# Altium PCB Quad FC V10.2.PcbDoc
Units mil, origin at the board's own origin, x right, y up, seen from the top; angles counter-clockwise.
Board outline 1968.5 x 1968.5 mil, 2 copper layers (Top Layer, Bottom Layer); 71 components, 48 nets, 303 pads, 19 vias.
Unrouted connection lines stored in the file: 22.
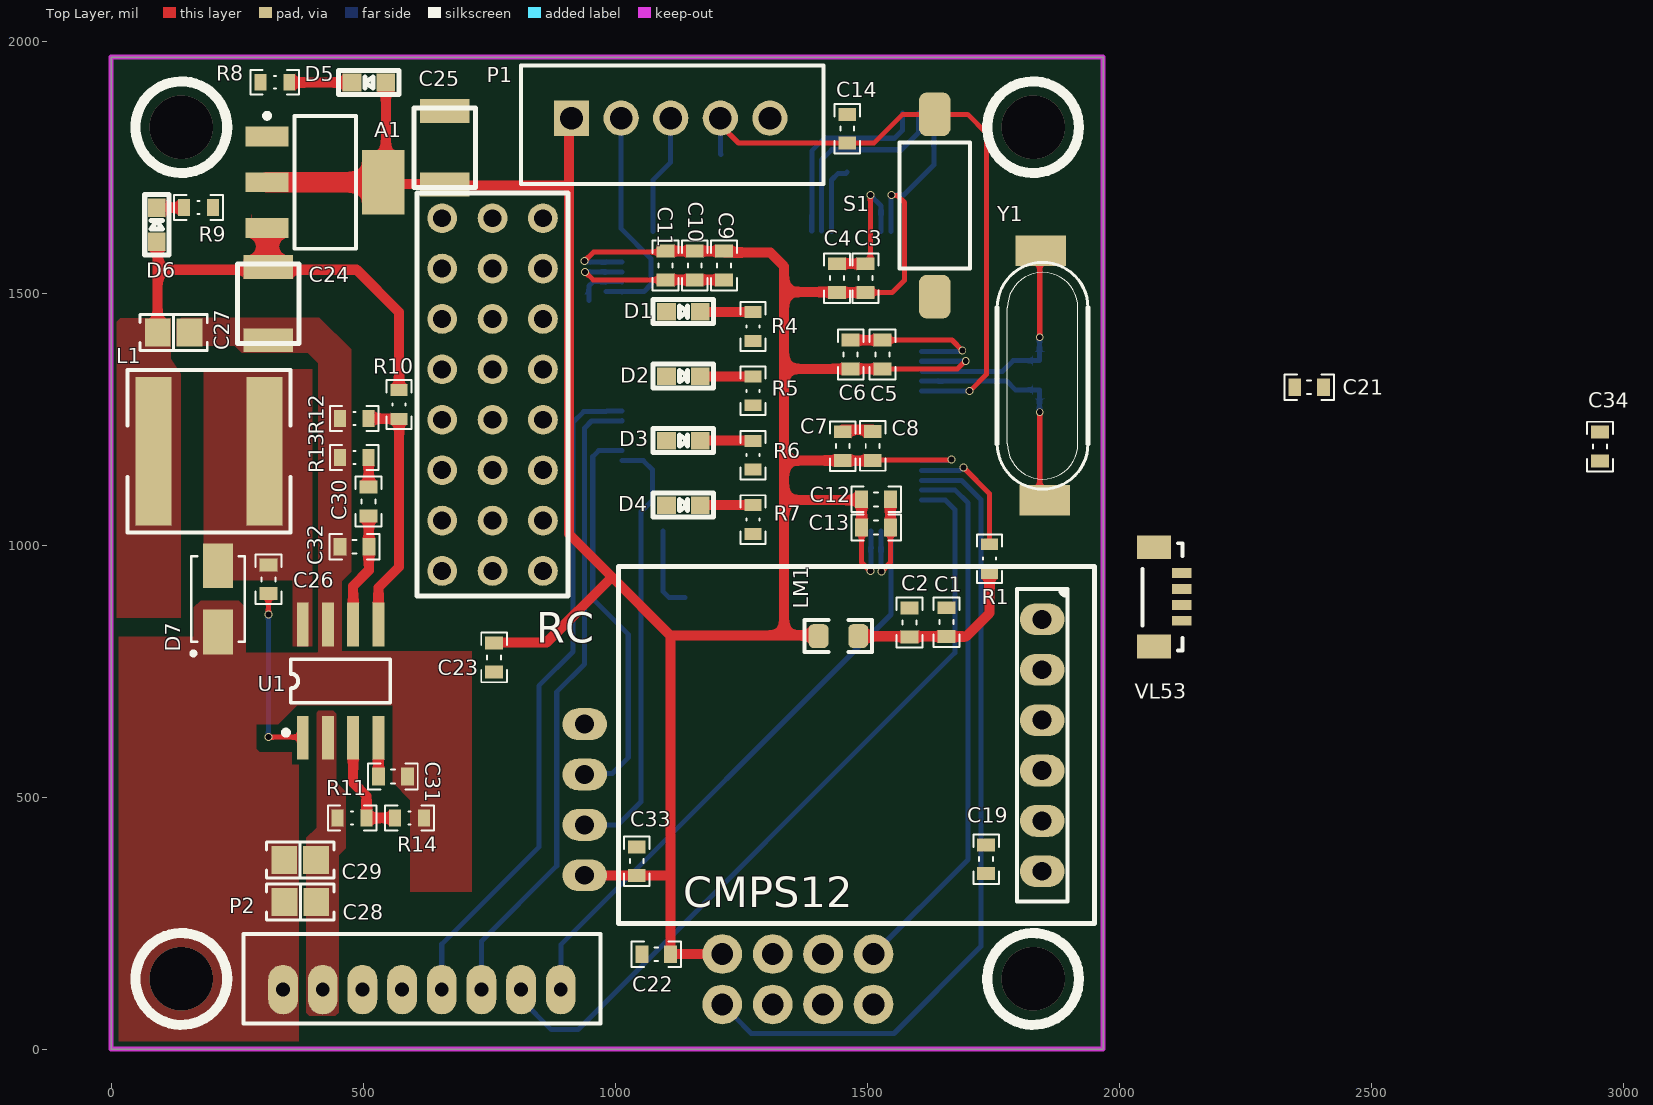
[diagram p0: Top Layer view]
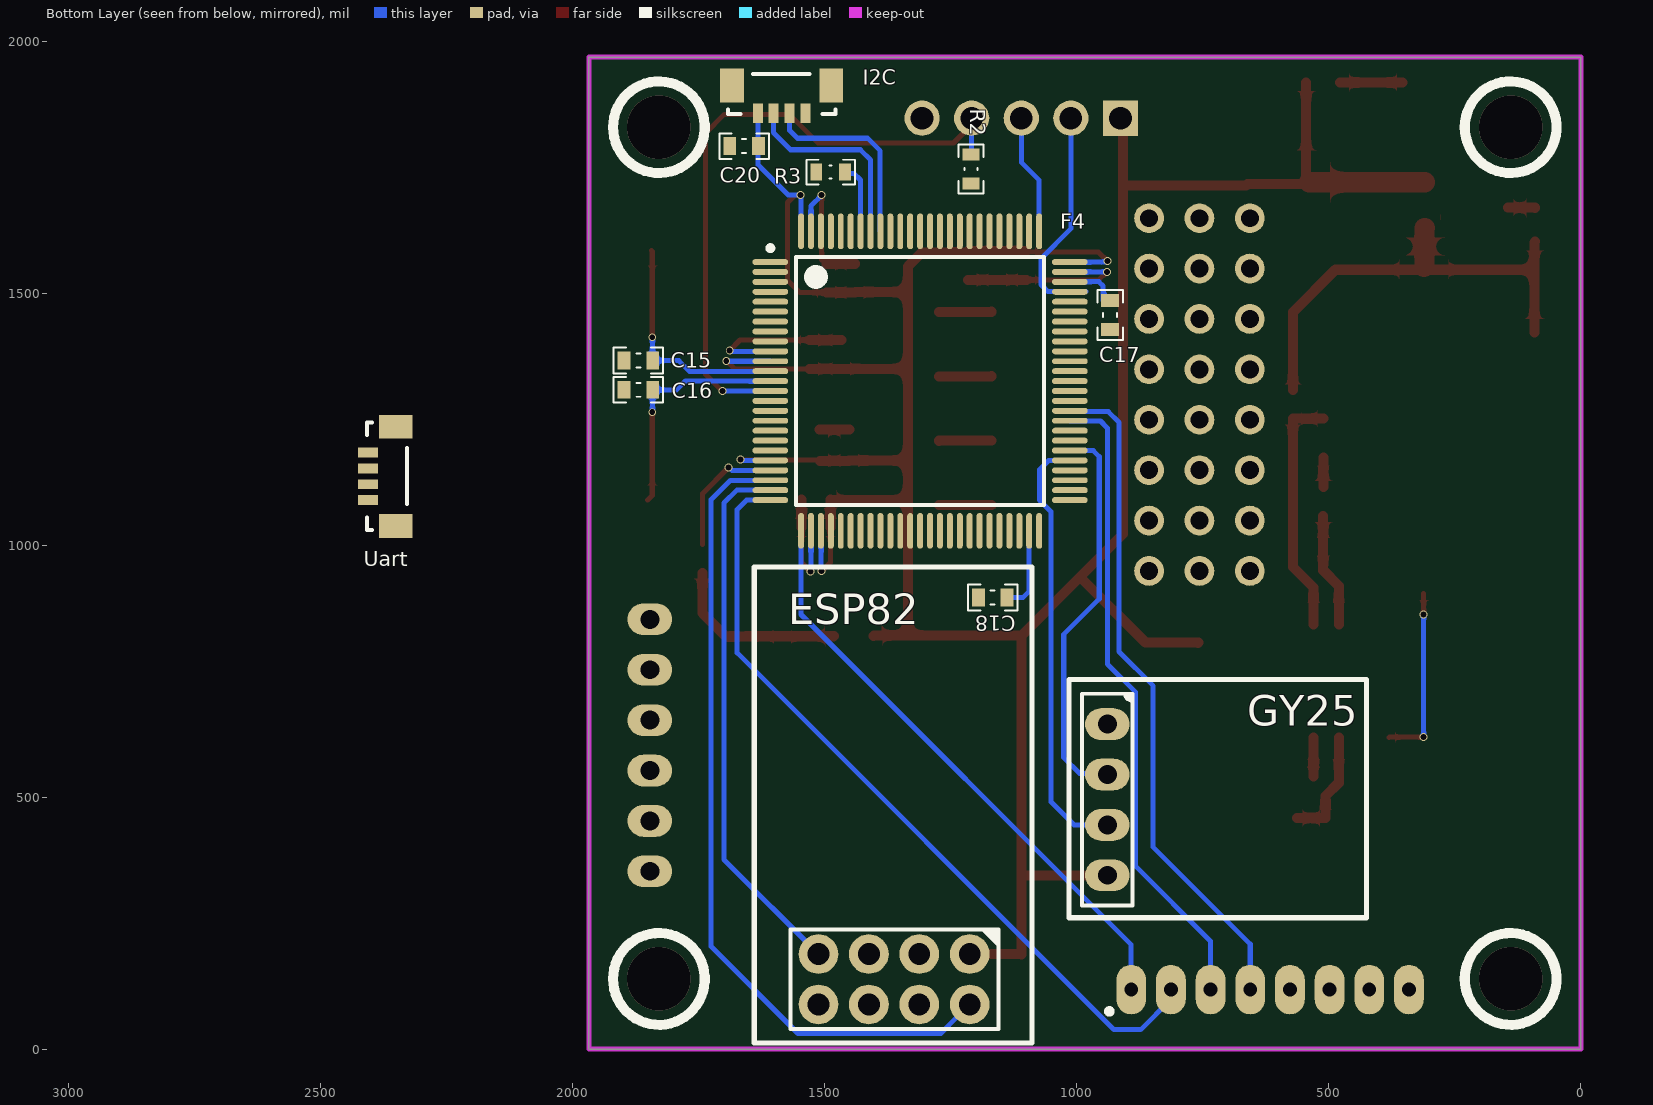
[diagram p1: Bottom Layer view, seen from below]

## Layer stack, top to bottom
Top Solder: solder mask 0.4, Solder Resist, Dk 3.5
Top Layer: signal copper 1.4
Dielectric 1: dielectric 12.6, FR-4, Dk 4.8
Bottom Layer: signal copper 1.4
Bottom Solder: solder mask 0.4, Solder Resist, Dk 3.5

## Board outline
0,0 1968.5,0 1968.5,1968.5 0,1968.5

## Design rules (kind name [scope] priority, off if disabled: settings)
Clearance Clearance_1 [InNamedPolygon('GND_L01_P011')] p1: gap=10 ignorepadtopadclearanceinfootprint=FALSE except(0: Arc-Hole Track-Hole SMDPad-Hole THPad-Hole Via-Hole Fill-Hole Poly-Hole Region-Hole Text-Hole)
Clearance [All] p2: gap=6 ignorepadtopadclearanceinfootprint=FALSE except(0: Arc-Hole Track-Hole SMDPad-Hole THPad-Hole Via-Hole Fill-Hole Poly-Hole Region-Hole Text-Hole)
HoleSize [All] p1: absolutevalues=TRUE maxlimit=393.7 minlimit=1 maxpercent=80.000 minpercent=20.000
PlaneConnect PlaneConnect_2 [All] p1: planeconnectstyle=Direct reliefexpansion=20 reliefentries=4 reliefconductorwidth=10 reliefairgap=10
PlaneConnect PlaneConnect_1 [All] p2: planeconnectstyle=Relief reliefexpansion=20 reliefentries=4 reliefconductorwidth=10 reliefairgap=10
PlaneConnect [All] p3: planeconnectstyle=Relief reliefexpansion=20 reliefentries=4 reliefconductorwidth=10 reliefairgap=10
PolygonConnect PolygonConnect_27 [All vs IsNamedPolygon('GND_L01_P011')] p1: connectstyle=Direct reliefconductorwidth=10 reliefentries=4 polygonreliefangle="90 Angle" airgapwidth=10
PolygonConnect PolygonConnect_26 [All vs IsNamedPolygon('NETC26_1_L01_P009')] p2: connectstyle=Direct reliefconductorwidth=10 reliefentries=4 polygonreliefangle="90 Angle" airgapwidth=10
PolygonConnect PolygonConnect_25 [All vs IsNamedPolygon('12V_L01_P010')] p3: connectstyle=Direct reliefconductorwidth=10 reliefentries=4 polygonreliefangle="90 Angle" airgapwidth=10
PolygonConnect PolygonConnect_24 [All vs IsNamedPolygon('VBAT+_L01_P008')] p4: connectstyle=Direct reliefconductorwidth=10 reliefentries=4 polygonreliefangle="90 Angle" airgapwidth=10
PolygonConnect PolygonConnect_23 [All vs IsNamedPolygon('NETC17_1_L01_P008')] p5: connectstyle=Direct reliefconductorwidth=10 reliefentries=4 polygonreliefangle="90 Angle" airgapwidth=10
PolygonConnect PolygonConnect_22 [All vs IsNamedPolygon('VBAT+_L01_P007')] p6: connectstyle=Direct reliefconductorwidth=10 reliefentries=4 polygonreliefangle="90 Angle" airgapwidth=10
PolygonConnect PolygonConnect_21 [All vs IsNamedPolygon('VBAT+_L01_P007')] p7: connectstyle=Direct reliefconductorwidth=10 reliefentries=4 polygonreliefangle="90 Angle" airgapwidth=10
PolygonConnect PolygonConnect_20 [All vs IsNamedPolygon('NONET_L01_P003')] p8: connectstyle=Direct reliefconductorwidth=10 reliefentries=4 polygonreliefangle="90 Angle" airgapwidth=10
PolygonConnect PolygonConnect_19 [All vs IsNamedPolygon('NONET_L01_P003')] p9: connectstyle=Direct reliefconductorwidth=10 reliefentries=4 polygonreliefangle="90 Angle" airgapwidth=10
PolygonConnect PolygonConnect_18 [All vs IsNamedPolygon('NONET_L01_P002')] p10: connectstyle=Direct reliefconductorwidth=10 reliefentries=4 polygonreliefangle="90 Angle" airgapwidth=10
PolygonConnect PolygonConnect_17 [All vs IsNamedPolygon('NONET_L01_P001')] p11: connectstyle=Direct reliefconductorwidth=10 reliefentries=4 polygonreliefangle="90 Angle" airgapwidth=10
PolygonConnect PolygonConnect_16 [All vs IsNamedPolygon('NETC37_1_L01_P000')] p12: connectstyle=Direct reliefconductorwidth=10 reliefentries=4 polygonreliefangle="90 Angle" airgapwidth=10
PolygonConnect PolygonConnect_15 [All vs IsNamedPolygon('GND_L02_P008')] p13: connectstyle=Direct reliefconductorwidth=10 reliefentries=4 polygonreliefangle="90 Angle" airgapwidth=10
PolygonConnect PolygonConnect_14 [All vs IsNamedPolygon('GND_L01_P007')] p14: connectstyle=Direct reliefconductorwidth=10 reliefentries=4 polygonreliefangle="90 Angle" airgapwidth=10
PolygonConnect PolygonConnect_13 [All vs IsNamedPolygon('GND_L02_P001') Or IsNamedPolygon('NONET_L02_P004')] p15: connectstyle=Direct reliefconductorwidth=10 reliefentries=4 polygonreliefangle="90 Angle" airgapwidth=10
PolygonConnect PolygonConnect_12 [All vs IsNamedPolygon('GND_L01_P006')] p16: connectstyle=Direct reliefconductorwidth=10 reliefentries=4 polygonreliefangle="90 Angle" airgapwidth=10
PolygonConnect PolygonConnect_11 [All vs IsNamedPolygon('GND_L01_P005')] p17: connectstyle=Direct reliefconductorwidth=10 reliefentries=4 polygonreliefangle="90 Angle" airgapwidth=10
PolygonConnect PolygonConnect_10 [All vs IsNamedPolygon('NETC37_1_L01_P002')] p18: connectstyle=Direct reliefconductorwidth=10 reliefentries=4 polygonreliefangle="90 Angle" airgapwidth=10
PolygonConnect PolygonConnect_9 [All vs IsNamedPolygon('MP1584-FB_L01_P005')] p19: connectstyle=Direct reliefconductorwidth=10 reliefentries=4 polygonreliefangle="90 Angle" airgapwidth=10
PolygonConnect PolygonConnect_8 [All vs IsNamedPolygon('GND_L02_P001')] p20: connectstyle=Direct reliefconductorwidth=10 reliefentries=4 polygonreliefangle="90 Angle" airgapwidth=10
PolygonConnect PolygonConnect_7 [All vs IsNamedPolygon('MP1584-FB_L01_P005')] p21: connectstyle=Direct reliefconductorwidth=10 reliefentries=4 polygonreliefangle="90 Angle" airgapwidth=10
PolygonConnect PolygonConnect_6 [All vs IsNamedPolygon('MP1584-FB_L01_P005')] p22: connectstyle=Direct reliefconductorwidth=10 reliefentries=4 polygonreliefangle="90 Angle" airgapwidth=10
PolygonConnect PolygonConnect_5 [All vs IsNamedPolygon('NONET_L02_P004')] p23: connectstyle=Direct reliefconductorwidth=10 reliefentries=4 polygonreliefangle="90 Angle" airgapwidth=10
PolygonConnect PolygonConnect_4 [All vs IsNamedPolygon('NETC34_1_L01_P003')] p24: connectstyle=Direct reliefconductorwidth=10 reliefentries=4 polygonreliefangle="90 Angle" airgapwidth=10
PolygonConnect PolygonConnect_3 [All vs IsNamedPolygon('NETC34_2_L01_P002')] p25: connectstyle=Direct reliefconductorwidth=10 reliefentries=4 polygonreliefangle="90 Angle" airgapwidth=10
PolygonConnect PolygonConnect_2 [All vs IsNamedPolygon('GND_L02_P001')] p26: connectstyle=Direct reliefconductorwidth=10 reliefentries=4 polygonreliefangle="90 Angle" airgapwidth=10
PolygonConnect PolygonConnect_1 [All vs IsNamedPolygon('VBAT+_L01_P000')] p27: connectstyle=Direct reliefconductorwidth=10 reliefentries=4 polygonreliefangle="90 Angle" airgapwidth=10
PolygonConnect [All] p28: connectstyle=Relief reliefconductorwidth=10 reliefentries=4 polygonreliefangle="90 Angle" airgapwidth=10
RoutingVias [All] p1: holewidth=11.81 width=15.75 viastyle="Through Hole" minholewidth=10 minwidth=10 maxholewidth=196.85 maxwidth=196.85
SilkToSilkClearance [All] p1: silktosilkclearance=6
SolderMaskExpansion [All] p1: expansion=2 istentingtop=FALSE soldermaskfromhole=TRUE
Width [All] p1: maxlimit=60 minlimit=6 preferedwidth=20
27 further rules are at their usual default settings.

## Classes and differential pairs
component class "Quad FC power V10.2": A1 C24 C25 C26 C27 C28 C29 C30 C31 C32 D5 D6 D7 L1 P2 R8 R9 R10 R11 R12 R13 R14 U1
component class "Quad FC V10.2": -- C1 C2 C3 C4 C5 C6 C7 C8 C9 C10 C11 C12 C13 C14 C15 C16 C17 C18 C19 C20 C21 C22 C23 C33 C34 CMPS12 D1 D2 D3 D4 ESP82 F4 GY25 I2C LM1 P1 R1 R2 R3 R4 R5 R6 R7 RC S1 Uart VL53 Y1

## Components (designator, comment, footprint, x,y, rotation, side; value= is the part's Value field where it differs from the comment)
A1 "3.3V linear regulator" SOT230P700X180-4N 424.41,1720.08 r0 top
C1 "100nF" CAP0603 1657.43,847.17 r270 top
C2 "1uF" CAP0603 1583.86,846.46 r270 top
C3 "100nF" CAP0603 1496.85,1529.92 r270 top
C4 "100nF" CAP0603 1440.16,1529.92 r270 top
C5 "100nF" CAP0603 1530.32,1378.35 r270 top
C6 "100nF" CAP0603 1467.32,1378.35 r270 top
C7 "100nF" CAP0603 1451.58,1196.46 r90 top
C8 "1uF" CAP0603 1511.02,1196.85 r90 top
C9 "100nF" CAP0603 1215.75,1554.92 r90 top
C10 "4.7uF" CAP0603 1157.87,1554.92 r90 top
C11 "100nF" CAP0603 1100,1554.92 r90 top
C12 "100nF" CAP0603 1517.72,1090.95 r180 top
C13 "100nF" CAP0603 1517.72,1035.04 r180 top
C14 "100nF" CAP0603 1460.63,1826.38 r90 top
C15 "10pF" CAP0603 1870.08,1366.14 r180 bottom
C16 "10pF" CAP0603 1870.08,1308.27 r0 bottom
C17 "2.2uF" CAP0603 933.86,1456.69 r270 bottom
C18 "2.2uF" CAP0603 1166.93,896.06 r0 bottom
C19 "100nF" CAP0603 1736.22,376.77 r90 top
C20 "100nF" CAP0603 1660.24,1791.73 r0 bottom
C21 "100nF" CAP0603 2377.17,1313.39 r180 top
C22 "100nF" CAP0603 1081.5,188.19 r180 top
C23 "100nF" CAP0603 759.84,777.17 r270 top
C24 "10uF" MY_CAP_SMD-B 311.42,1479.13 r270 top value=3300u
C25 "100uF" MY_CAP_SMD-B 661.81,1788.58 r90 top value=3300u
C26 "100nF" CAP0603 312.2,932.28 r270 top
C27 "10 µF" "CAP 0805_2012" 123.62,1422.05 r180 top
C28 "10 µF" "CAP 0805_2012" 375.2,291.73 r0 top
C29 "10 µF" "CAP 0805_2012" 374.8,375.2 r0 top
C30 "1nF" CAP0603 510.63,1086.61 r90 top
C31 "8.2nF" CAP0603 559.06,540.95 r0 top
C32 "10pF" CAP0603 482.68,996.85 r180 top
C33 "100nF" CAP0603 1042.91,372.83 r90 top
C34 "100nF" CAP0603 2954.32,1195.67 r90 top
CMPS12 "CMPS12" "SAMTEC SSW-106-03-T-S" 1847.25,602.76 r270 top
D1 "LED" "0603 - LED" 1135.43,1463.39 r0 top
D2 "LED" "0603 - LED" 1135.43,1335.43 r0 top
D3 "LED" "0603 - LED" 1135.43,1207.48 r0 top
D4 "LED" "0603 - LED" 1135.43,1079.53 r0 top
D5 "LED" "0603 - LED" 511.42,1918.11 r180 top
D6 "LED" "0603 - LED" 90.55,1635.83 r90 top
D7 "1n5822" DIOM4226X244N 212.2,893.31 r90 top
ESP82 "ESP82" "HARWIN M20-7830445" 1362.6,138.58 r270 bottom
F4 "STM32F407VGT6" STM-LQFP100_N 1311.02,1325.59 r180 bottom
GY25 "GY25" "SAMTEC SSW-104-03-T-S" 939.37,494.88 r270 bottom
I2C "I2C" "JST BM04B-SURS-TF" 1585.83,1884.65 r180 bottom
L1 "10 µH" "TAIYO YUDEN NRS8030" 194.09,1186.22 r180 top
LM1 "10uH" 0805L 1442.91,819.69 r180 top value=FB805
P1 "Programming connector" Connector1X5 913.39,1847.25 r0 top
P2 "Connector 8" "JST B8B-PH-K" 616.54,118.11 r180 top
R1 "0" RES0603 1742.91,973.23 r90 top
R2 "1K" RES0603 1209.84,1746.46 r90 bottom
R3 "1K" RES0603 1488.58,1740.16 r0 bottom
R4 "1K" RES0603 1273.62,1433.86 r270 top
R5 "1K" RES0603 1273.62,1306.17 r270 top
R6 "1K" RES0603 1273.62,1178.48 r270 top
R7 "1K" RES0603 1273.62,1050.79 r270 top
R8 "1K" RES0603 324.8,1918.51 r180 top
R9 "1K" RES0603 173.23,1670.08 r0 top
R10 "10.2k" RES0603 571.26,1279.13 r90 top
R11 "0.732k" RES0603 477.95,458.66 r180 top
R12 "0.732k" RES0603 482.28,1251.58 r0 top
R13 "36.5K" RES0603 482.28,1174.02 r0 top value=36.5k
R14 "0.732k" RES0603 591.93,458.66 r180 top
RC "Radio Control" HEADER8X3 856.69,948.82 r90 top
S1 "FSMSMTR" "TE FSMSMTR" 1634.25,1674.02 r0 top
U1 "TPS54331" SO8 455.12,730.32 r0 top
Uart "Uart" "JST BM04B-SURS-TF" 2379.13,1136.62 r270 bottom
VL53 "VL53" "JST BM04B-SURS-TF" 2096.85,897.24 r90 top
Y1 "CRYSTAL_SMD" "My_Crystal - SMD" 1848.16,1336.22 r90 top

## Footprints (in the part's own frame and the unit in brackets; to place one, negate y for a bottom-side part, rotate by r counter-clockwise, add the part's x,y. Pads: shape width x height; smd on the part's side, far side on the other; paste and mask are expansions set on the pad)
"0603 - LED" [mil]
  rect 37x35 smd: 1(-33.5,0) 2(33.5,0)
  silkscreen extent -60,-24 60,24, body extent -32,-16 32,16, height 43
0805L [mm] ",0805, 2012, 200X130"
  rrect50% 1x1.2 smd mask+0.075: 1(-1,0) 2(1,0)
  Top Layer pour cut-out: -0.5,0.8 0.5,0.8 0.5,-0.8 -0.5,-0.8
  silkscreen extent -1.7,-0.8 1.7,0.8, body extent -1,-0.6 1,0.6, height 0.95
CAP0603 [mm] "Chip Capacitor, 2-Leads, Body 1/60x0/80mm, IPC Medium Density DESIGNER:ABBAS BASEREH"
  rect 0.65x0.9 smd: 1(-0.725,0) 2(0.725,0)
  silkscreen extent -1.25,-0.65 1.25,0.65, body extent -0.82,-0.43 0.82,0.43, height 0.4
"CAP 0805_2012" [mm] "Chip Capacitor, 2-Leads, Body 2.00x1.20mm, IPC Medium Density"
  rect 1.3x1.4 smd: 1(-0.8,0) 2(0.8,0)
  silkscreen extent -1.7,-0.9 1.7,0.9, body extent -1,-0.64 1,0.64, height 1.26
Connector1X5 [mil] "Connector; Header; 5 Position"
  rect 70x70 hole 45: 1(0,0)
  round 70 hole 45: 2(98.43,0) 3(196.85,0) 4(295.28,0) 5(393.7,0)
  silkscreen extent -100,-130 500,104, body extent -93,-133 493,93, height 276
DIOM4226X244N [mm]
  rect 2.26x1.51 smd: 1(-1.67,0) 2(1.67,0)
  silkscreen extent -2.85,-1.35 2.15,1.35, body extent -2.6,-1.36 2.6,1.36, height 1.19
"HARWIN M20-7830445" [mm] "2.54mm DIL PC TAIL PIN HEADER ASSEMBLY"
  round 2 hole 1.1: 1(-1.27,3.81) 2(-1.27,1.27) 3(-1.27,-1.27) 4(-1.27,-3.81) 5(1.27,-3.81) 6(1.27,-1.27) 7(1.27,1.27) 8(1.27,3.81)
  silkscreen extent -2.5,-5.23 2.5,5.27, body extent -2.52,-5.28 2.52,5.28, height 8.5
HEADER8X3 [mm]
  round 1.5 hole 0.9: 1(0,0) 2(2.54,0) 3(5.08,0) 4(7.62,0) 5(10.16,0) 6(12.7,0) 7(15.24,0) 8(17.78,0) 9(0,2.54) 10(2.54,2.54) 11(5.08,2.54) 12(7.62,2.54) 13(10.16,2.54) 14(12.7,2.54) 15(15.24,2.54) 16(17.78,2.54) 17(0,5.08) 18(2.54,5.08) 19(5.08,5.08) 20(7.62,5.08) 21(10.16,5.08) 22(12.7,5.08) 23(15.24,5.08) 24(17.78,5.08)
  silkscreen extent -1.27,-1.27 19.05,6.35
"JST B8B-PH-K" [mm]
  oval 1.5x2.5 hole 0.7: 1(-7,0) 2(-5,0) 3(-3,0) 4(-1,0) 5(1,0) 6(3,0) 7(5,0) 8(7,0)
  silkscreen extent -9,-2.8 9,1.7, body extent -8.95,-2.8 8.95,1.7, height 6
"JST BM04B-SURS-TF" [mm] "1.0mm pitch/Disconnectable Crimp style connector"
  rect 0.5x1 smd: 1(-1.2,-0.7) 2(-0.4,-0.7) 3(0.4,-0.7) 4(1.2,-0.7)
  rect 1.2x1.7 smd: M(-2.5,0.7) M(2.5,0.7)
  silkscreen extent -2.7,-0.74 2.71,1.27, body extent -2.7,-1.02 2.7,1.23, height 2.75
MY_CAP_SMD-B [mm] "3.1X4"
  rect 1.2x2.5 smd: +(-1.845,0) -(1.845,0)
  silkscreen extent -2,-1.55 2,1.55, body extent -1.85,-1.41 1.85,1.41, height 2.14
"My_Crystal - SMD" [mil]
  rect 60x100 smd: 1(-247.06,-3.93) 2(248.03,3.94)
  silkscreen extent -225,-90 225,90, body extent -247,-98 245,91, height 154
RES0603 [mm] "Chip Resistor, 2-Leads, Body 1/60x0/80mm, IPC Medium Density DESIGNER:ABBAS BASEREH"
  rect 0.6x0.85 smd: 1(-0.725,0) 2(0.725,0)
  silkscreen extent -1.23,-0.63 1.23,0.62, body extent -0.82,-0.43 0.82,0.43, height 0.4
"SAMTEC SSW-104-03-T-S" [mm]
  oval 1.6x2.25 hole 0.95: 1(-3.81,0) 2(-1.27,0) 3(1.27,0) 4(3.81,0)
  silkscreen extent -5.34,-1.27 5.34,1.27, body extent -5.33,-1.21 5.33,1.21, height 8.51
"SAMTEC SSW-106-03-T-S" [mm]
  oval 1.6x2.25 hole 0.95: 1(-6.35,0) 2(-3.81,0) 3(-1.27,0) 4(1.27,0) 5(3.81,0) 6(6.35,0)
  silkscreen extent -7.88,-1.27 7.88,1.27, body extent -7.87,-1.21 7.87,1.21, height 8.51
SO8 [mm]
  rect 0.6x2.2 smd: 1(-1.905,-2.854) 2(-0.635,-2.854) 3(0.635,-2.854) 4(1.905,-2.854) 5(1.905,2.854) 6(0.635,2.854) 7(-0.635,2.854) 8(-1.905,2.854)
  silkscreen extent -2.88,-2.72 2.5,1.1, body extent -2.46,-2.79 2.44,2.98, height 1.45
SOT230P700X180-4N [mm] "SOT223, 4-Leads, Body 6.50x7.00mm (avg), Pitch 2.30mm, IPC Medium Density"
  rect 2.15x1 smd: 1(-2.925,2.3) 2(-2.925,0) 3(-2.925,-2.3)
  rect 2.15x3.25 smd: 4(2.925,0)
  silkscreen extent -3.05,-3.35 1.55,3.47, body extent -1.85,-3.35 1.85,3.35, height 1.8
STM-LQFP100_N [mm] "Thin QFP, 100-Leads, Body 14x14mm, Pitch 0.5mm, IPC Medium Density"
  oval 1.8x0.3 smd: 1(-7.55,6) 2(-7.55,5.5) 3(-7.55,5) 4(-7.55,4.5) 5(-7.55,4) 6(-7.55,3.5) 7(-7.55,3) 8(-7.55,2.5) 9(-7.55,2) 10(-7.55,1.5) 11(-7.55,1) 12(-7.55,0.5) 13(-7.55,0) 14(-7.55,-0.5) 15(-7.55,-1) 16(-7.55,-1.5) 17(-7.55,-2) 18(-7.55,-2.5) 19(-7.55,-3) 20(-7.55,-3.5) 21(-7.55,-4) 22(-7.55,-4.5) 23(-7.55,-5) 24(-7.55,-5.5) 25(-7.55,-6) 51(7.55,-6) 52(7.55,-5.5) 53(7.55,-5) 54(7.55,-4.5) 55(7.55,-4) 56(7.55,-3.5) 57(7.55,-3) 58(7.55,-2.5) 59(7.55,-2) 60(7.55,-1.5) 61(7.55,-1) 62(7.55,-0.5) 63(7.55,0) 64(7.55,0.5) 65(7.55,1) 66(7.55,1.5) 67(7.55,2) 68(7.55,2.5) 69(7.55,3) 70(7.55,3.5) 71(7.55,4) 72(7.55,4.5) 73(7.55,5) 74(7.55,5.5) 75(7.55,6)
  oval 0.3x1.8 smd: 26(-6,-7.55) 27(-5.5,-7.55) 28(-5,-7.55) 29(-4.5,-7.55) 30(-4,-7.55) 31(-3.5,-7.55) 32(-3,-7.55) 33(-2.5,-7.55) 34(-2,-7.55) 35(-1.5,-7.55) 36(-1,-7.55) 37(-0.5,-7.55) 38(0,-7.55) 39(0.5,-7.55) 40(1,-7.55) 41(1.5,-7.55) 42(2,-7.55) 43(2.5,-7.55) 44(3,-7.55) 45(3.5,-7.55) 46(4,-7.55) 47(4.5,-7.55) 48(5,-7.55) 49(5.5,-7.55) 50(6,-7.55) 76(6,7.55) 77(5.5,7.55) 78(5,7.55) 79(4.5,7.55) 80(4,7.55) 81(3.5,7.55) 82(3,7.55) 83(2.5,7.55) 84(2,7.55) 85(1.5,7.55) 86(1,7.55) 87(0.5,7.55) 88(0,7.55) 89(-0.5,7.55) 90(-1,7.55) 91(-1.5,7.55) 92(-2,7.55) 93(-2.5,7.55) 94(-3,7.55) 95(-3.5,7.55) 96(-4,7.55) 97(-4.5,7.55) 98(-5,7.55) 99(-5.5,7.55) 100(-6,7.55)
  silkscreen extent -7.68,-6.25 6.25,6.82, body extent -7,-7 7,7, height 1.6
"TAIYO YUDEN NRS8030" [mm] "Precision Wire Wound Inductor, 2-Leads, Body 8.00x8.00mm, IPC Medium Density"
  rect 1.8x7.5 smd: 1(-2.8,0) 2(2.8,0)
  silkscreen extent -4.1,-4.1 4.1,4.1, body extent -4,-4 4,4, height 3
"TE FSMSMTR" [mm]
  rrect50% 1.6x2.19 smd: 1(0,4.595) 2(0,-4.595)
  silkscreen extent -1.78,-3.17 1.78,3.17, body extent -1.75,-4.98 1.75,4.98, height 4.42

## Part data
A1: library part ams1117
C1 C2 C3 C4 C5 C6 C7 C8 C9 C10 C11 C12 C13 C14 C15 C16 C17 C18 C19 C20 C21 C22 C23 C26 C30 C31 C32 C33 C34: library part "CAP SMD PACKAGE", "F407VET6 Power CAP", Data=2017-3-10, Desc.="CAP SMD TOTAL PACKAGES", Designer="Abbas Basereh"
C24 C25: library part CAP_TANTAL_B, "3.5X2.8MM"
C27 C28 C29: library part GRM21BR61H106KE43K, "CAP CER 10UF 50V X5R 0805", Device Package="0805 (2012 Metric)", Manufacturer="Murata Electronics", Operating Temperature="-55°C ~ 85°C", Supplier Part Number 1=490-GRM21BR61H106KE43KCT-ND, Temperature Coefficient=X5R, Tolerance=±10%, Voltage - Rated=50V, Applications="General Purpose", Capacitance="10 µF", ComponentLink1Description=Datasheet, ComponentLink1URL=https://search.murata.co.jp/Ceramy/image/img/A01X/G101/ENG/GRM21BR61H106KE43-01A.pdf, ComponentLink2Description="DigiKey Link", ComponentLink2URL=https://www.digikey.com/en/products/detail/murata-electronics/GRM21BR61H106KE43K/15191954, LastUpdated="2/9/2024 8:15:01 PM", Lifecycle Status=Active, Minimum Order=1, Mounting Type="Surface Mount, MLCC", Package / Case="0805 (2012 Metric)", Packaging=TapeAndReel, Part Number=GRM21BR61H106KE43K, Part Status=Active, partid=40508, Price=0.05, Series=GRM, Size / Dimension="0.079\" L x 0.049\" W (2.00mm x 1.25mm)", Supplier 1=DigiKey, Thickness (Max)="0.057\" (1.45mm)"
CMPS12: library part SSW-106-03-T-S, "CONN RCPT 6POS 0.1 TIN PCB", Current Rating (Amps)="5.7A per Contact", Insulation Color=Black, Manufacturer="Samtec Inc.", Material Flammability Rating="UL94 V-0", Operating Temperature="-55°C ~ 105°C", Supplier Part Number 1=SAM8865-ND, ComponentLink1Description=Datasheet, ComponentLink1URL=http://suddendocs.samtec.com/prints/ssw-s.pdf, ComponentLink2Description="DigiKey Link", ComponentLink2URL=https://www.digikey.com/en/products/detail/samtec-inc/SSW-106-03-T-S/1790202, Connector Type=Receptacle, Contact Finish - Mating=Tin, Contact Finish - Post=Tin, Contact Length - Post="0.394\" (10.00mm)", Contact Type=Forked, Fastening Type=Push-Pull, Insulation Height="0.335\" (8.51mm)", LastUpdated="6/21/2022 3:09:22 PM", Lifecycle Status=Active, Minimum Order=1, Mounting Type="Through Hole", Number of Positions=6, Number of Positions Loaded=All, Number of Rows=1, Packaging=Bulk, Part Number=SSW-106-03-T-S, Part Status=Active, Pitch - Mating="0.100\" (2.54mm)", Price=0.55, Series=SSW, Style="Board to Board or Cable", Supplier 1=DigiKey, Termination=Solder
D1 D2 D3 D4 D5 D6: "Led", LatestRevisionDate=08-Jul-2005, LatestRevisionNote="Mech Layer 1 removed.", PackageReference=LED-0, Published=8-Jun-2000, Publisher="Altium Limited"
D7: library part "1n5822 SMD", "Schottky Rectifiers", Manufacturer="ON Semiconductor/Fairchild", Data=16-12-2016, Designer="Abbas Basereh", Link=https://www.aliexpress.com/item/Free-shipping-100pcs-1n5822-sma-smd-do-214ac-Schottky-diode-ss34/32337482329.html?spm=2114.01010208.3.1.zLZDsP&ws_ab_test=searchweb0_0,searchweb201602_4_10065_10068_10084_10083_10080_10082_10081_10060_10061_10062_10056_10055_10054_10059_10099_10078_10079_427_10073_10103_10102_10096_10052_10050_10051,searchweb201603_4&btsid=6e50dc92-ac69-45bc-a19e-209af19ce602, Part. No=SS34
ESP82: library part M20-7830442, "CONN RCPT 8POS 0.1 GOLD PCB", Current Rating (Amps)=3A, Insulation Color=Black, Manufacturer="Harwin Inc.", Material Flammability Rating="UL94 V-0", Operating Temperature="-40°C ~ 105°C", Supplier Part Number 1=952-1789-ND, ComponentLink1Description=Datasheet, ComponentLink1URL=https://cdn.harwin.com/pdfs/C001XX_M20_Series_Connectors.pdf, ComponentLink2Description="DigiKey Link", ComponentLink2URL=http://digikey.com/product-detail/en/harwin-inc/M20-7830442/952-1789-ND/3727758, Connector Type=Receptacle, Contact Finish - Mating=Gold, Contact Finish - Post=Tin, Contact Finish Thickness - Mating=Flash, Contact Length - Post="0.118\" (3.00mm)", Contact Type="Female Socket", Fastening Type=Push-Pull, Insulation Height="0.335\" (8.51mm)", LastUpdated="9/21/2022 7:04:26 PM", Lifecycle Status=Active, Mated Stacking Heights="11.04mm, 12.63mm", Minimum Order=1, Mounting Type="Through Hole", Number of Positions=8, Number of Positions Loaded=All, Number of Rows=2, Packaging=Tube, Part Number=M20-7830442, Part Status=Active, Pitch - Mating="0.100\" (2.54mm)", Price=1.36, Row Spacing - Mating="0.100\" (2.54mm)", Series=M20, Style="Board to Board or Cable", Supplier 1=DigiKey, Termination=Solder
F4: "ARM Cortex-M4 32-bit MCU+FPU, 210 DMIPS, 1024 kB Flash, 192 kB Internal RAM, 82 I/Os, 100-pin LQFP, -40 to 85 degC, Tray", I/Os (High Current)=82, Manufacturer=STMicroelectronics, Operating Frequency(F) (Processor speed) (MHz)=168, Supplier Part Number 1=497-11605-ND, Supply Voltage(Vcc) max (V)=3.6, Supply Voltage(Vcc) min (V)=1.8, ComponentLink1Description="Manufacturer URL", ComponentLink1URL=http://www.st.com/web/en/home.html, ComponentLink2Description=Datasheet, ComponentLink2URL=http://www.st.com/st-web-ui/static/active/en/resource/technical/document/datasheet/DM00037051.pdf, ComponentLink3Description="Package Specification", ComponentLink3URL=http://www.st.com/st-web-ui/static/active/en/resource/technical/document/data_brief/DM00071938.pdf, Core="ARM Cortex-M4", D/A Converter=2x12-bit, DatasheetVersion="Rev. 4", FLASH Size (Prog) (kB)=1024, Internal RAM Size (kB)=192, Mounting Technology="Surface Mount", PackageDescription="100-Pin Low Profile Quad Flat Package, 14 x 14 mm Body, 0.5 mm Pitch", PackageReference=LQFP100, PackageVersion="Rev. 1, 06/2013", Packing=Tray, PartNumber=STM32F407VGT6, Supplier 1=Digi-Key, Supplier 2=Farnell, Supplier 3=Newark, Supplier 4=Mouser, Supplier Part Number 2=2064368, Supplier Part Number 3=73T2333, Supplier Part Number 4=511-STM32F407VGT6
GY25: library part SSW-104-03-T-S, "CONN RCPT 4POS 0.1 TIN PCB", Current Rating (Amps)="5.7A per Contact", Insulation Color=Black, Manufacturer="Samtec Inc.", Material Flammability Rating="UL94 V-0", Operating Temperature="-55°C ~ 105°C", Supplier Part Number 1=SSW-104-03-T-S-ND, ComponentLink2Description="DigiKey Link", ComponentLink2URL=http://digikey.com/product-detail/en/samtec-inc/SSW-104-03-T-S/SSW-104-03-T-S-ND/7874034, Connector Type=Receptacle, Contact Finish - Mating=Tin, Contact Finish - Post=Tin, Contact Type=Forked, Fastening Type=Push-Pull, LastUpdated="6/21/2022 3:08:52 PM", Lifecycle Status=Active, Minimum Order=1, Mounting Type="Through Hole", Number of Positions=4, Number of Positions Loaded=All, Number of Rows=1, Packaging=Bulk, Part Number=SSW-104-03-T-S, Part Status=Active, Price=0.83, Series=SSW, Style="Board to Board or Cable", Supplier 1=DigiKey, Termination=Solder
I2C Uart VL53: library part MHDR_1X04, "Male Header 1X04"
L1: library part NRS8030T100MJGJV, "FIXED IND 10UH 3A 42.9 MOHM SMD", Current - Saturation=2.4A, Current Rating (Amps)="3 A", DC Resistance (DCR)="42.9mOhm Max", Device Package=Nonstandard, Frequency - Self Resonant=27MHz, Inductance Frequency - Test="100 kHz", Manufacturer="Taiyo Yuden", Operating Temperature="-40°C ~ 125°C", Ratings=AEC-Q200, Supplier Part Number 1=587-3647-1-ND, Tolerance=±20%, ComponentLink1Description=Datasheet, ComponentLink1URL="https://ds.yuden.co.jp/TYCOMPAS/ut/detail?pn=NRS8030T100MJGJV  &u=M", ComponentLink2Description="DigiKey Link", ComponentLink2URL=https://www.digikey.com/en/products/detail/taiyo-yuden/NRS8030T100MJGJV/4693986, Height - Seated (Max)="0.118\" (3.00mm)", Inductance="10 µH", LastUpdated="2/8/2024 9:55:48 PM", Lifecycle Status=Active, Material - Core=Ferrite, Minimum Order=1, Mounting Type="Surface Mount", Package / Case=Nonstandard, Packaging=TapeAndReel, Part Number=NRS8030T100MJGJV, Part Status=Active, partid=5482, Price=0.23, Series="NR, S Type", Shielding=Shielded, Size / Dimension="0.315\" L x 0.315\" W (8.00mm x 8.00mm)", Supplier 1=DigiKey, Type="Drum Core, Wirewound"
LM1: library part "L SMA 0.25W", "Inductor", Code_IEC=1005, Code_JEITA=0402, LatestRevisionDate=29-May-2009, LatestRevisionNote="IPC-7351 Footprint Added.", PackageDescription="Chip Inductor", PackageReference=0402-A, Published=8-Jun-2000, Publisher="Altium Limited"
P1: library part Connector1x5, "Connector, 5-Pin2.5mm", LatestRevisionDate=17-Jul-2002, LatestRevisionNote="Re-released for DXP Platform.", Publisher="Altium Limited"
P2: library part Connector1x8, "Connector, 8-Pin2.5mm", LatestRevisionDate=17-Jul-2002, LatestRevisionNote="Re-released for DXP Platform.", Publisher="Altium Limited"
R1 R2 R3 R4 R5 R6 R7 R8 R9 R10 R11 R12 R13 R14: library part "RES SMD PACKAGE", "TOTAL SMD RESISTOR PACK", Data=2017-3-10, Desc.="RES SMD PAKAGES", Designer="Abbas Basereh"
RC: library part MHDR_2X12, "Male Header 2X12"
S1: "SWITCH TACTILE SPST-NO 0.05A 24V", Contact Rating @ Voltage="0.05A @ 24VDC", Manufacturer="TE Connectivity ALCOSWITCH Switches", Operating Force=180gf, Operating Temperature="-35°C ~ 85°C", Supplier Part Number 1=450-1758-1-ND, Actuator Height off PCB, Vertical=4.57mm, Actuator Orientation="Top Actuated", Actuator Type=Standard, Circuit=SPST-NO, ComponentLink1Description=Datasheet, ComponentLink1URL=https://www.te.com/commerce/DocumentDelivery/DDEController?Action=srchrtrv&DocNm=1437566-3&DocType=Customer+Drawing&DocLang=English, ComponentLink2Description="DigiKey Link", ComponentLink2URL=https://www.digikey.com/en/products/detail/te-connectivity-alcoswitch-switches/FSMSMTR/529671, Illumination=Non-Illuminated, LastUpdated="2/8/2024 9:49:52 PM", Lifecycle Status=Active, Minimum Order=1, Mounting Type="Surface Mount", Outline="6.00mm x 3.50mm", Packaging=TapeAndReel, Part Number=FSMSMTR, Part Status=Active, Price=0.20, Series=FSMSM, Supplier 1=DigiKey, Switch Function=Off-Mom, Termination Style="Gull Wing"
U1: "DC/DC Switching Regulators 2A,28V,1MHz Step Down SWIFT DC/D;Output Voltage:0.8 V to 25 V", Link=http://javanelec.com/productsDetails.aspx?id=33786
Y1: "Crystal"

## Via types
v1: diameter 15.75, hole 11.81, Top Layer to Bottom Layer, 15 vias
v2: diameter 125.98, hole 125.98, Top Layer to Bottom Layer, 4 vias

## Nets (pads, with @x,y where several pads share a name; then routed paths per layer and width w, separated by ;. In a path a pad name is that pad's centre, name@x,y a point inside that pad or via, vN(x,y) a via of type N, cw(c..) or ccw(c..) an arc to the next point about the centre after c; other vN are vias at no path point)
3V3: A1.2 A1.4 C3.2 C4.2 C5.2 C6.2 C7.1 C8.1 C9.2 C10.2 C11.2 C12.2 C13.2 C19.1 C20.1 C21.1 C22.1 C23.1 C25.+ C33.1 C34.1 CMPS12.6 D5.1 ESP82.1 F4.11 F4.19 F4.21 F4.28 F4.50 F4.75 F4.100 GY25.4 I2C.1 LM1.2 P1.1 R2.1 RC.9 Uart.1 VL53.1 | length 6577.6
  Top Layer w10: v1(939.37,1563.87) 956.91,1581.42 1097.95,1581.42 C11.2 ; C13.2 1489.17,965.87 v1(1506.61,948.43) ; C3.2 1549.8,1501.38 1574.02,1525.59 1574.02,1679.92 1559.94,1694 1549.31,1694 v1(1548.43,1694.88) ; C8.1@1511.91,1168.01 1513.21,1169.31 1666.32,1169.31 v1(1667.32,1170.31) ; C5.2 1679.27,1349.8 1695.21,1365.75 v1(1695.67,1365.75)
  Top Layer w20: D5.1 544.92,1725.43 A1.4 543.11,1716.54 C25.+@661.21,1716.54 ; C25.+ 664.36,1713.39 908.27,1713.39 ; C23.1@759.06,806.5 C23.1@759.25,806.5 ; C23.1 759.25,806.3 C23.1@759.25,806.5 ; P1.1 908.27,1842.13 908.27,1713.39 ; GY25.4 939.67,344.59 1042.62,344.59 C33.1 1106.89,344.29 1109.45,341.73 ; C11.2 C10.2 C9.2 1218.51,1580.71 1307.87,1580.71 1335.24,1553.35 1335.24,1502.36 ; ESP82.1 1212.4,188.39 1110.24,188.39 C22.1 1109.45,188.78 1109.45,341.73 ; LM1.2 1402.36,820.87 1335.24,820.87 ; C4.2@1439.17,1502.36 1335.24,1502.36 ; C4.2 C3.2 ; C7.1 1335.24,1167.91 ; C7.1@1452.17,1167.32 C8.1@1510.04,1167.32 ; C13.2 C12.2 1487.6,1089.37 1335.24,1089.37 ; C5.2 C6.2 1335.24,1349.8 ; C23.1@759.25,806.5 863.19,806.5 993.5,936.81 ; 908.27,1713.39 908.27,1022.05 993.5,936.81 ; 993.5,936.81 1109.45,820.87 ; 1109.45,341.73 1109.45,820.87 ; 1109.45,820.87 1335.24,820.87 ; 1335.24,820.87 1335.24,1089.37 ; 1335.24,1089.37 1335.24,1167.91 ; 1335.24,1167.91 1335.24,1349.8 ; 1335.24,1349.8 1335.24,1502.36
  Top Layer w40: A1.2 A1.4
  Bottom Layer w10: v1(939.37,1563.87) 940.93,1563.87 942.98,1561.81 F4.75 ; v1(1506.61,948.43) 1507.53,949.34 1507.53,1028 F4.28 ; F4.100 1547.59,1623.18 1547.59,1694.05 v1(1548.43,1694.88) 1572.84,1694.88 1632.68,1754.73 1632.68,1790.75 C20.1 ; F4.21 1663.57,1168.11 1665.77,1170.31 v1(1667.32,1170.31) ; F4.11 1694.88,1364.96 v1(1695.67,1365.75) ; C20.1@1633.07,1790.75 I2C.1
12V: A1.3 C24.+ C27.2 D6.1 L1.2 R10.2 | length 928.6
  Top Layer w20: D6.1 92.13,1600.75 92.13,1546.46 ; C27.2 92.13,1546.46 ; R10.2 571.26,1462.2 487.01,1546.46 92.13,1546.46
  Top Layer w40: A1.3 310.02,1629.53 310.34,1629.21 310.34,1552.86 C24.+
"ESC Rx": F4.25 P2.2 | length 1572.8
  Bottom Layer w10: P2.2 813.39,98.43 873.23,38.58 926.38,38.58 1674.02,786.22 1674.02,1070.87 1655.51,1089.37 F4.25
"ESC Tx": F4.26 P2.1 | length 1181.6
  Bottom Layer w10: P2.1 892.13,207.09 1547.25,862.21 F4.26
"ESP82 RX": ESP82.8 F4.23 | length 1644.7
  Bottom Layer w10: ESP82.8 1212.6,71.26 1224.8,59.06 1231.88,66.13 1235.05,66.13 1270.08,31.1 1553.15,31.1 1725.99,203.94 1725.99,1090.16 1687.4,1128.74 F4.23
"ESP82 TX": ESP82.4 F4.24 | length 1082.7
  Bottom Layer w10: ESP82.4@1512.6,196.18 ESP82.4 1700,375.98 1700,1083.86 1674.8,1109.06 F4.24
"F407 NRST": C14.1 F4.14 P1.4 R2.2 S1.1 | length 1289.8
  Top Layer w10: P1.4 1208.66,1833.86 1244.69,1797.83 C14.1 ; C14.1@1460.63,1797.64 1513.39,1797.64 1570.67,1854.92 S1.1 1644.69,1854.92 1699.41,1854.92 1737.01,1817.32 1737.01,1338.98 v1(1703.54,1305.51)
  Bottom Layer w10: P1.4 1208.66,1776.18 R2.2 ; F4.14 1608.47,1305.71 1703.35,1305.71 v1(1703.54,1305.51)
"F407 OSC IN": C15.2 F4.12 Y1.2 | length 460.9
  Top Layer w10: v1(1842.52,1412.6) 1842.52,1582.56 Y1.2
  Bottom Layer w10: F4.12@1608.66,1344.88 1608.71,1344.93 1639.42,1344.93 1639.47,1344.88 1768.5,1344.88 1789.76,1366.14 C15.2 1842.03,1366.63 1842.03,1412.11 v1(1842.52,1412.6)
"F407 OSC OUT": C16.1 F4.13 Y1.1 | length 463.9
  Top Layer w10: v1(1842.52,1263.78) 1842.52,1098.72 Y1.1
  Bottom Layer w10: F4.13 1776.77,1325.59 1794.09,1308.27 C16.1 1842.03,1307.78 1842.03,1264.27 v1(1842.52,1263.78)
"F407 SWCLK": F4.76 P1.3 | length 239.1
  Bottom Layer w10: F4.76 1074.81,1724.22 1110.24,1759.65 P1.3
"F407 SWDIO": F4.72 P1.2 | length 450
  Bottom Layer w10: F4.72@982.19,1503.54 982.63,1503.1 1013.43,1503.1 F4.72 1014.13,1503.1 1057.04,1503.1 1071.26,1517.32 1071.26,1568.5 1011.81,1627.95 P1.2
GND: A1.1 C1.1 C2.1 C3.1 C4.1 C5.1 C6.1 C7.2 C8.2 C9.1 C10.1 C11.1 C12.1 C13.1 C14.2 C15.1 C16.2 C17.2 C18.2 C19.2 C20.2 C21.2 C22.2 C23.2 C24.- C25.- C27.1 C28.1 C29.1 C31.2 C32.2 C33.2 C34.2 CMPS12.1 D7.1 ESP82.5 F4.10 F4.20 F4.27 F4.74 F4.99 GY25.1 I2C.4 P1.5 P2.8 R3.2 R4.2 R5.2 R6.2 R7.2 R8.2 R9.2 R12.1 R13.1 R14.1 RC.17 RC.18 RC.19 RC.20 RC.21 RC.22 RC.23 RC.24 S1.2 U1.7 Uart.4 VL53.4 | length 1236.7
  Top Layer w10: v1(939.76,1542.13) 940.62,1542.13 956.37,1526.38 C11.1 ; C3.1 1498.5,1558.46 1506.3,1566.26 v1(1506.3,1694.49) ; v1(1528.35,947.64) 1546.26,965.55 C13.1 ; C5.1 1668.31,1406.89 v1(1688.81,1386.39)
  Top Layer w20: C11.1 C10.1 C9.1 ; C4.1 C3.1 ; C7.2@1451.18,1229.13 1451.28,1229.23 1510.14,1229.23 C8.2@1510.24,1229.33 ; C6.1 C5.1 ; C13.1 C12.1
  Bottom Layer w10: v1(939.76,1542.13) F4.74 ; v1(1506.3,1694.49) 1527.56,1673.27 F4.99 ; F4.27 1527.56,948.43 v1(1528.35,947.64) ; F4.10 1685.52,1384.65 1687.26,1386.39 v1(1688.81,1386.39)
  other v2: 139.19,139.19
"GY25 Rx": F4.55 GY25.3 | length 867.1
  Bottom Layer w10: GY25.3 1005.51,444.88 1051.18,490.55 1051.18,1066.54 1074.02,1089.37 1074.02,1149.61 1055.86,1167.76 1014.13,1167.76 F4.55
"GY25 Tx": F4.56 GY25.2 | length 790.2
  Bottom Layer w10: GY25.2 941.34,546.85 994.49,546.85 1025.98,578.35 1025.98,823.03 955.51,893.5 955.51,1175.59 967.37,1187.45 1013.43,1187.45 F4.56
I2C_SCL: F4.92 I2C.3 | length 390
  Bottom Layer w10: F4.92@1390.16,1623.23 1390.11,1623.28 1390.11,1653.99 1390.16,1654.04 1390.16,1782.52 1415.12,1807.48 1554.33,1807.48 1570.08,1823.23 I2C.3
I2C_SDA: F4.93 I2C.2 | length 395.5
  Bottom Layer w10: F4.93@1409.06,1623.23 1409.1,1623.28 1409.1,1653.99 1409.06,1654.04 1409.06,1764.17 1429.53,1784.65 1568.11,1784.65 1602.36,1818.9 1602.36,1856.3 I2C.2
LED1: D1.1 F4.64
LED2: D2.1 F4.63
LED3: D3.1 F4.57
LED4: D4.1 F4.46
NetC1_2: C1.2 C2.2 LM1.1 R1.1 | length 360
  Top Layer w20: LM1.1 1482.82,819.15 1583.86,819.15 1656.9,819.15 C1.2 1696.58,818.62 1742.91,864.96 R1.1
NetC17_1: C17.1 F4.73 | length 98.8
  Bottom Layer w10: C17.1@947.64,1485.24 947.64,1514.17 956.25,1522.79 1013.43,1522.79 F4.73
NetC18_1: C18.1 F4.49 | length 169.4
  Bottom Layer w10: F4.49 1094.49,908.27 1107.09,895.67 1137.99,895.67 C18.1
NetC26_1: C26.1 D7.2 L1.1 U1.8
NetC26_2: C26.2 U1.1 | length 353.7
  Top Layer w10: v1(311.81,618.9) 379.17,618.9 U1.1 ; v1(311.81,862.6) 311.81,903.35 C26.2
  Bottom Layer w10: v1(311.81,618.9) v1(311.81,862.6)
NetC30_1: C30.1 C32.1 U1.6 | length 228.5
  Top Layer w10: C30.1 C30.1@511.22,1057.48
  Top Layer w20: U1.6 480.12,919.1 511.22,950.2 C30.1@511.22,1057.48
NetC30_2: C30.2 R13.2 | length 58.9
  Top Layer w10: C30.2 C30.2@510.83,1115.35
  Top Layer w20: C30.2@510.83,1115.35 R13.2
NetC31_1: C31.1 U1.4 | length 77.2
  Top Layer w20: U1.4 530.32,617.76 530.32,541.14 C31.1
NetD1_2: D1.2 R4.1 | length 105.1
  Top Layer w20: D1.2 1169.43,1462.89 1273.13,1462.89 R4.1
NetD2_2: D2.2 R5.1 | length 105
  Top Layer w20: D2.2 1169.29,1335.07 1273.26,1335.07 R5.1
NetD3_2: D3.2 R6.1 | length 104.9
  Top Layer w20: D3.2 1169.16,1207.25 1273.39,1207.25 R6.1
NetD4_2: D4.2 R7.1 | length 104.8
  Top Layer w20: D4.2 1169.03,1079.43 1273.52,1079.43 R7.1
NetD5_2: D5.2 R8.1 | length 124.7
  Top Layer w10: R8.1 R8.1@353.74,1918.11
  Top Layer w20: R8.1@353.74,1918.11 D5.2
NetD6_2: D6.2 R9.1 | length 54.4
  Top Layer w20: D6.2 90.93,1669.7 144.31,1669.7 R9.1
NetF4_22: F4.22 R1.2 | length 258.8
  Top Layer w10: v1(1691.08,1153.98) 1742.91,1102.14 R1.2
  Bottom Layer w10: F4.22 1683.97,1148.43 1689.52,1153.98 v1(1691.08,1153.98)
NetF4_94: F4.94 R3.1 | length 139
  Bottom Layer w10: F4.94 1429.48,1623.18 1429.48,1724.76 1442.52,1737.8 1457.68,1737.8 R3.1
NetR10_1: R10.1 R12.2 U1.5 | length 485.8
  Top Layer w20: R12.2 511.32,1251.08 570.77,1251.08 R10.1 571.26,956.69 530.32,915.75 530.32,842.87 U1.5
NetR11_1: R11.1 R14.2 U1.3 | length 227.1
  Top Layer w20: U1.3 480.12,528.54 506.5,502.17 R11.1 R14.2
"PWM MOTOR 1": F4.59 P2.3 | length 1279.6
  Bottom Layer w10: P2.3 734.65,214.17 884.08,363.61 884.08,708.88 939.37,764.17 939.37,1232.68 953.2,1246.5 1013.43,1246.5 F4.59
"PWM MOTOR 2": F4.60 P2.4 | length 1340.5
  Bottom Layer w10: P2.4 655.91,208.27 848.43,400.79 848.43,720.87 916.14,788.58 916.14,1243.7 937.4,1264.96 982.19,1264.96 983.76,1266.54 F4.60
"PWM MOTOR 3": F4.61 P2.5
"PWM MOTOR 4": F4.62 P2.6
"RC PWM INPUT 1": F4.30 RC.1
"RC PWM INPUT 2": F4.31 RC.2
"RC PWM INPUT 3": F4.32 RC.3
"RC PWM INPUT 4": F4.35 RC.4
"RC PWM INPUT 5": F4.36 RC.5
VBAT+: C28.2 C29.2 P2.7 R11.2 U1.2
pads on no net: CMPS12.2 CMPS12.3 CMPS12.4 CMPS12.5 ESP82.2 ESP82.3 ESP82.6 ESP82.7 F4.1 F4.2 F4.3 F4.4 F4.5 F4.6 F4.7 F4.8 F4.9 F4.15 F4.16 F4.17 F4.18 F4.29 F4.33 F4.34 F4.37 F4.38 F4.39 F4.40 F4.41 F4.42 F4.43 F4.44 F4.45 F4.47 F4.48 F4.51 F4.52 F4.53 F4.54 F4.58 F4.65 F4.66 F4.67 F4.68 F4.69 F4.70 F4.71 F4.77 F4.78 F4.79 F4.80 F4.81 F4.82 F4.83 F4.84 F4.85 F4.86 F4.87 F4.88 F4.89 F4.90 F4.91 F4.95 F4.96 F4.97 F4.98 I2C.M RC.6 RC.7 RC.8 RC.10 RC.11 RC.12 RC.13 RC.14 RC.15 RC.16 Uart.2 Uart.3 Uart.M VL53.2 VL53.3 VL53.M
copper on no net:
  other v2: 1829.31,139.19 139.19,1829.31 1829.31,1829.31

## Polygon pours and split planes (outlines as drawn)
GND on Top Layer "GND_L01_P011" (solid, pour order 11): 245.28,1396.06 259.06,1382.28 389.76,1382.28 391.34,1380.71 410.63,1361.42 410.63,788.58 408.66,786.61 266.54,786.61 266.54,875.98 252.76,889.76 177.17,889.76 164.17,876.77 164.17,818.11 0,818.11 0,-5.91 372.05,-5.91 372.05,588.58 294.49,588.58 287.4,595.67 287.4,644.49 331.5,644.49 368.9,681.89 558.27,681.89 558.27,529.13 593.7,493.7 593.7,312.6 715.35,312.6 715.35,788.98 475.98,788.98 458.27,788.98 457.09,790.16 457.09,928.74 475.98,947.64 475.98,1388.58 412.99,1451.58 138.58,1451.58 129.53,1442.52 129.53,1396.06
12V on Top Layer "12V_L01_P010" (solid, pour order 10): 11.22,1442.91 18.3,1450 117.72,1450 117.72,1369.66 138.19,1339.79 138.19,855.91 -4.72,855.91 -4.72,1442.91
NetC26_1 on Top Layer "NETC26_1_L01_P009" (solid, pour order 9): 360.37,799.23 399.21,799.23 399.21,1348.82 183.46,1348.82 183.46,930.71 360.37,930.71
VBAT+ on Top Layer "VBAT+_L01_P008" (solid, remove dead copper, pour order 8): 411.02,671.26 407.48,667.72 407.48,439.37 387.01,418.9 387.01,71.65 392.52,66.14 444.88,66.14 451.18,72.44 451.18,384.65 464.96,398.43 464.96,511.02 446.06,529.92 446.06,665.75 440.55,671.26

## Keep-outs
Keep-Out Layer:
  the board outline again, w10

## Silkscreen, mask and mechanical layers (free items; w line width, h text height)
Top Overlay:
  circle w20: c139.19,139.19 r91.04
  circle w20: c1829.31,1829.31 r91.04
  circle w20: c139.19,1829.31 r91.04
  circle w20: c1829.31,139.19 r91.04
  lines w10: 1006.3,248.82 1006.3,957.48 1951.18,957.48 1951.18,248.82 1006.3,248.82
Bottom Overlay:
  circle w20: c1829.31,1829.31 r91.04
  circle w20: c139.19,1829.31 r91.04
  circle w20: c139.19,139.19 r91.04
  circle w20: c1829.31,139.19 r91.04
  lines w10: 424.8,260.63 424.8,733.07 1015.36,733.07 1015.36,260.63 424.8,260.63 ; 1088.98,11.81 1640.16,11.81 1640.16,956.69 1088.98,956.69 1088.98,11.81